# Altium PCB Gas_Gauge.PcbDoc
Units mm, origin at the board's own origin, x right, y up, seen from the top; angles counter-clockwise.
Board outline 100.33 x 95.76 mm, 2 copper layers (Top Layer, Bottom Layer); 76 components, 52 nets, 227 pads, 131 vias.
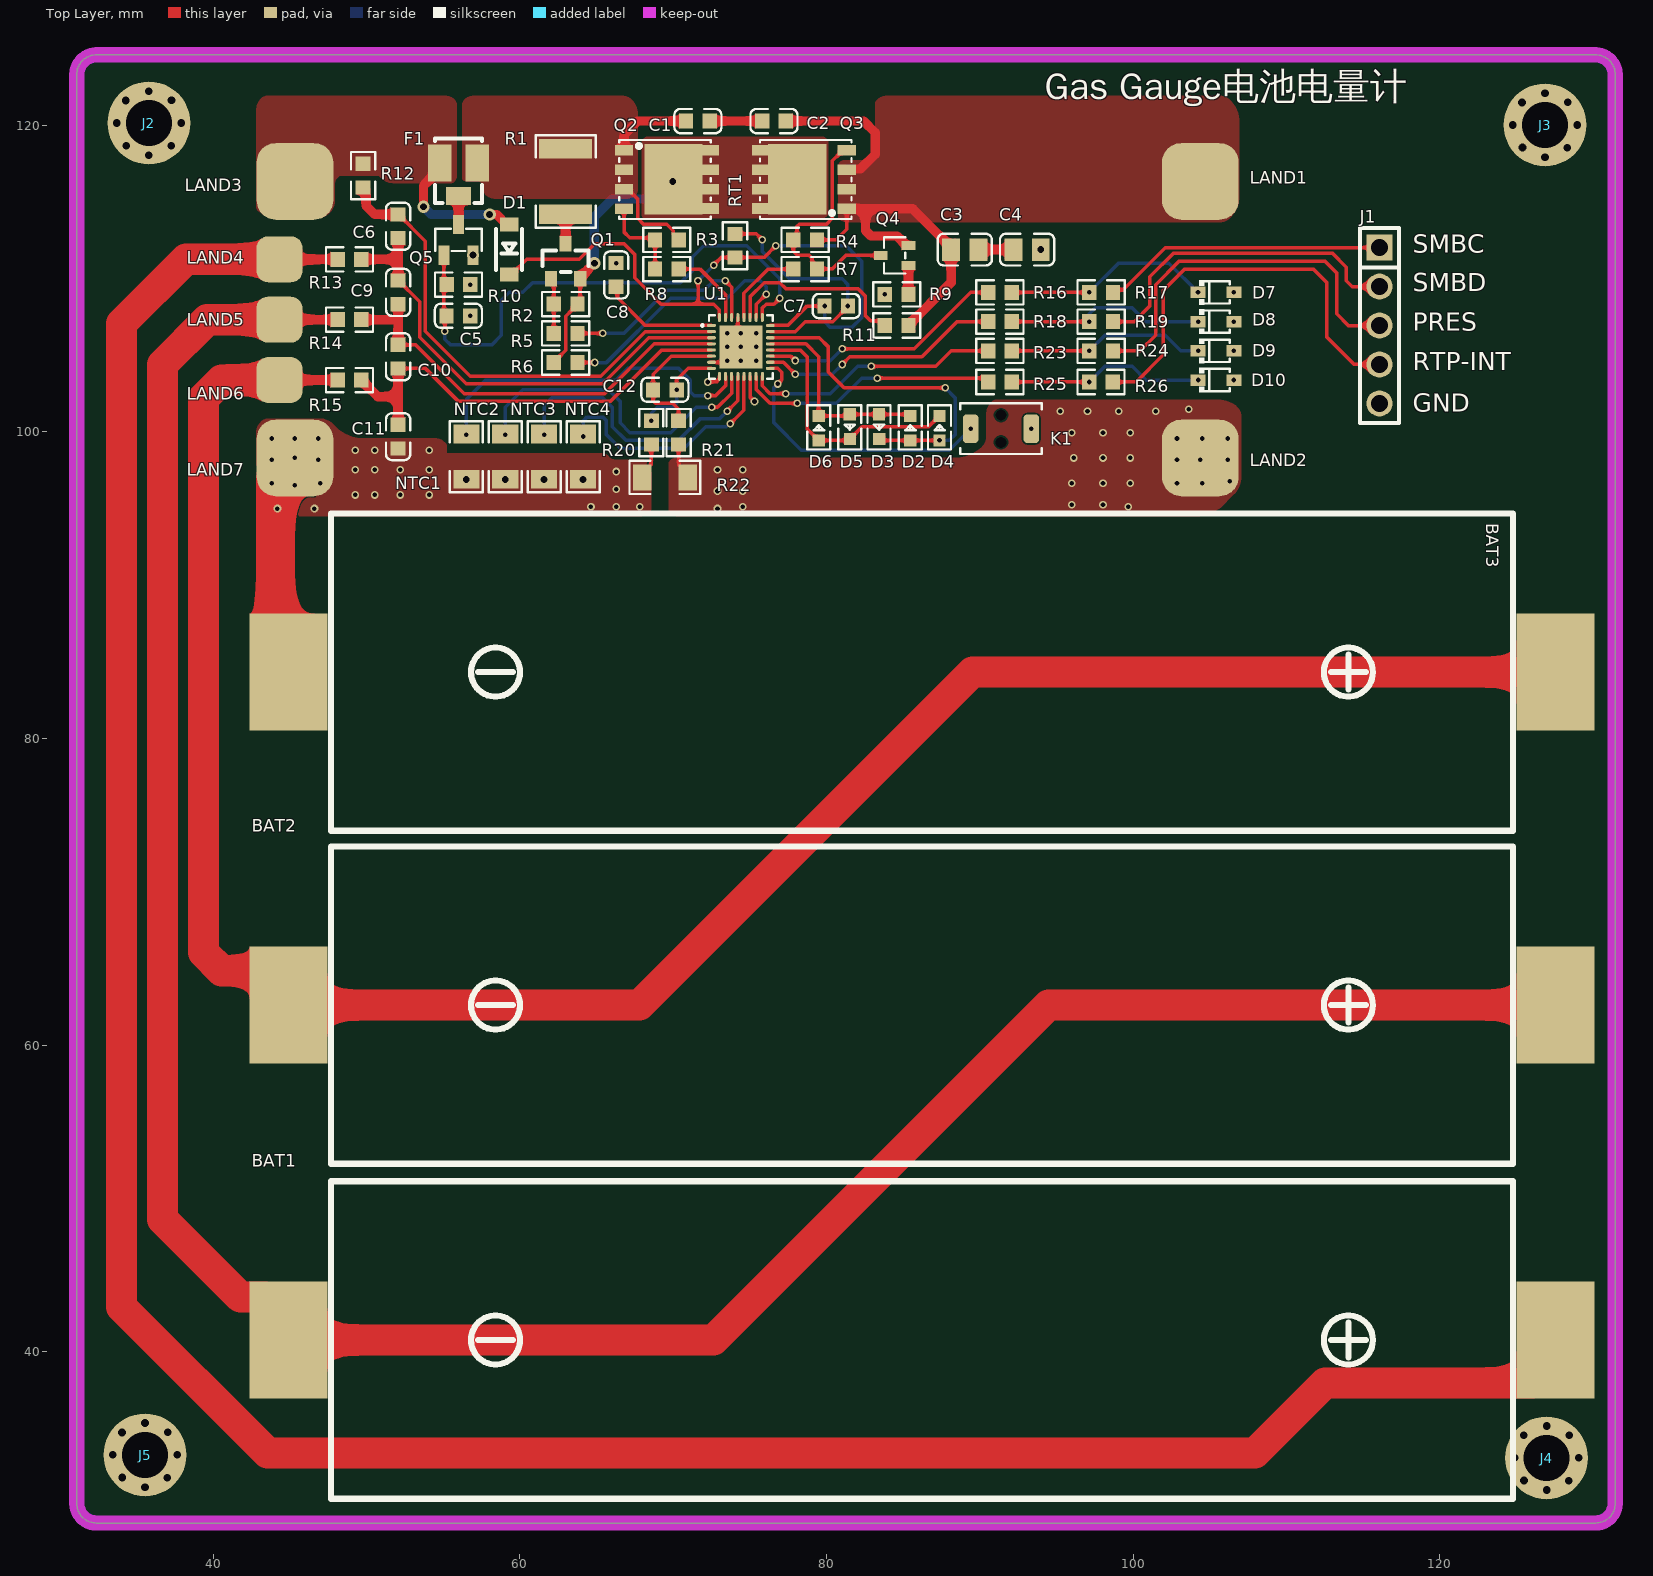
[diagram p0: Top Layer view]
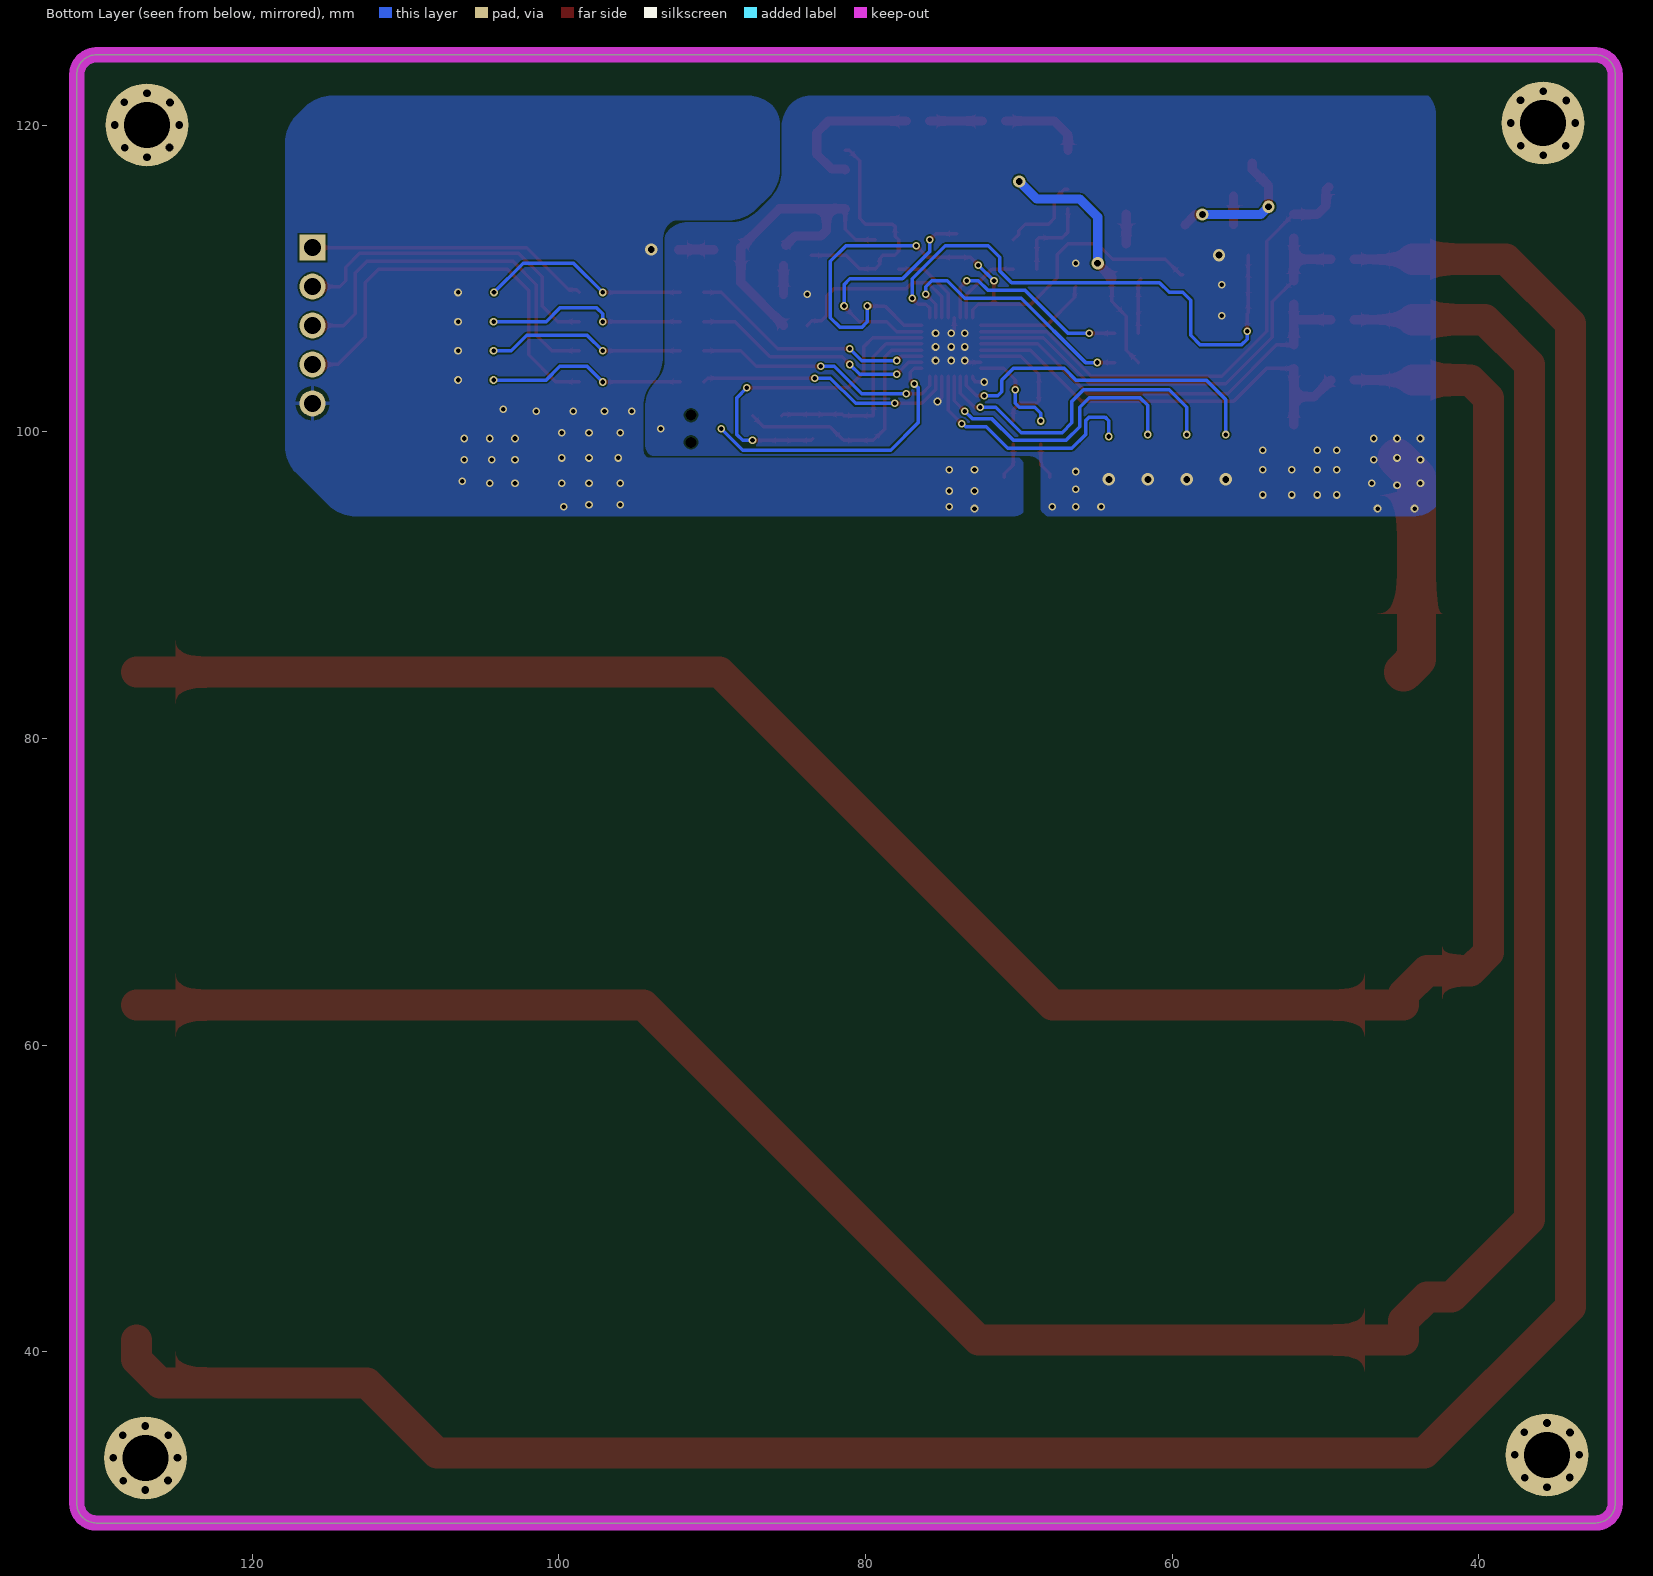
[diagram p1: Bottom Layer view, seen from below]
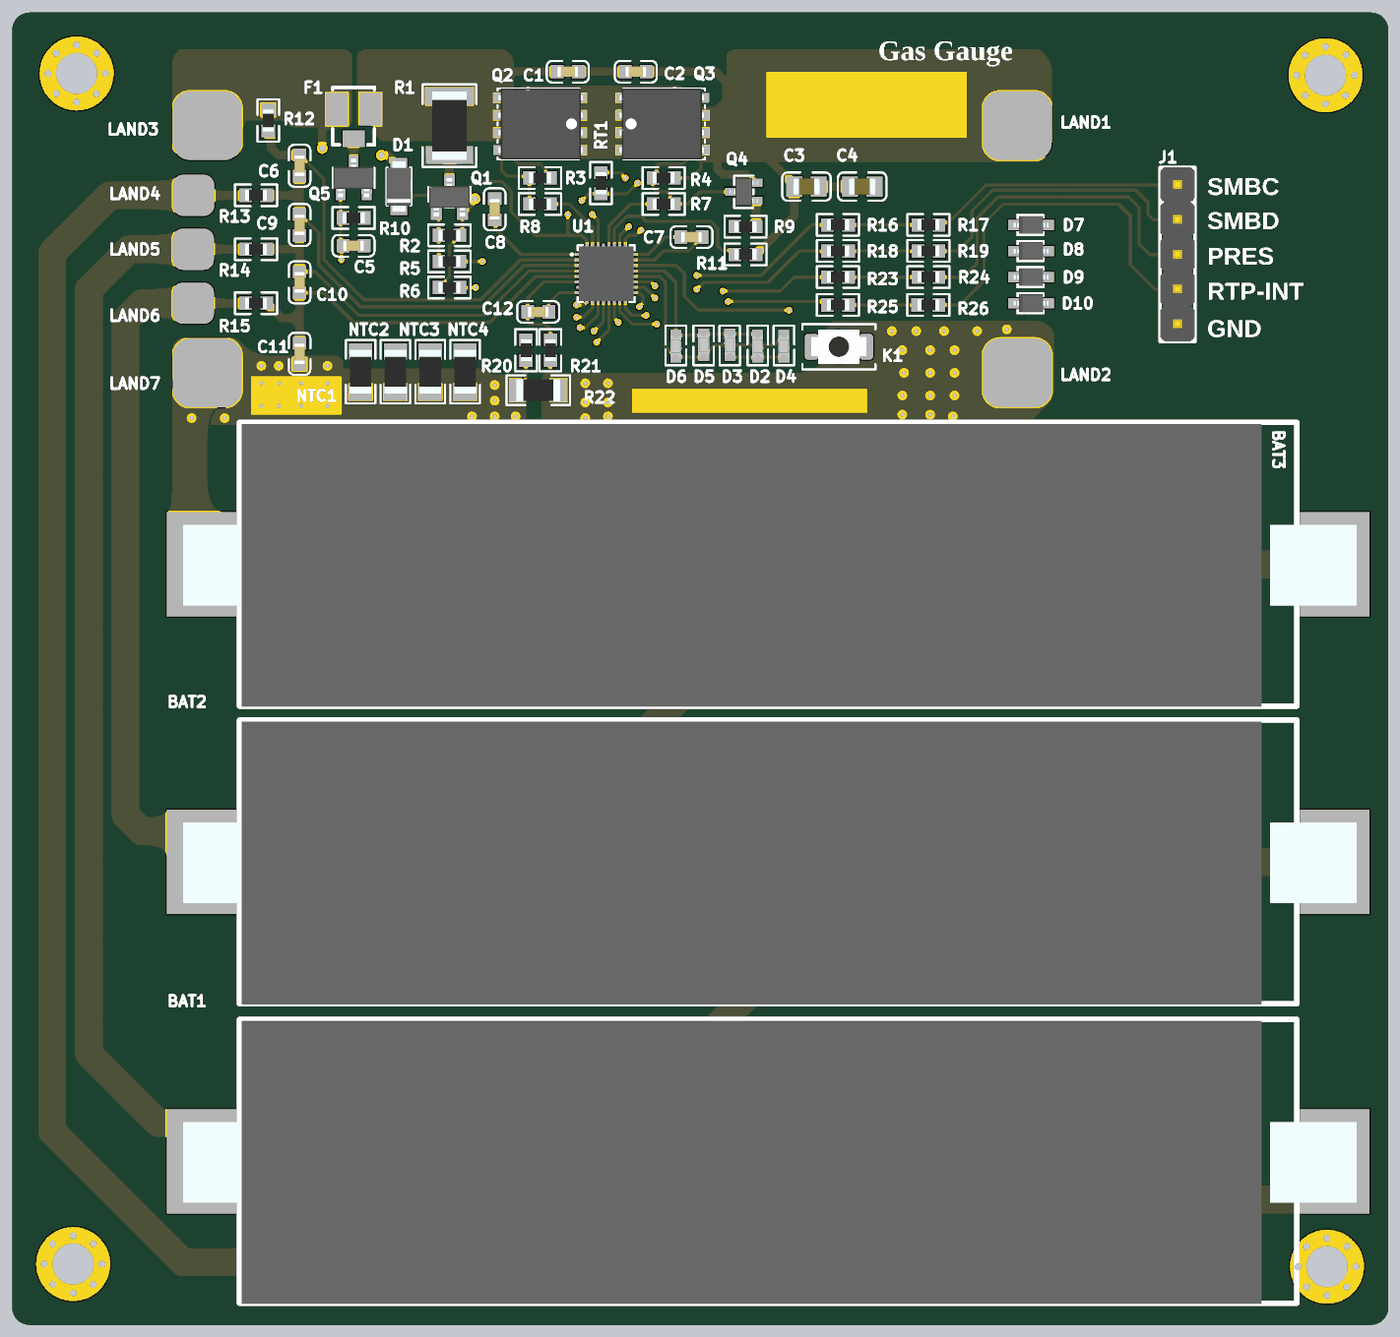
[diagram p2: 3D render of the assembled board from above, using the file's embedded part models]

## Layer stack, top to bottom
Top Solder: solder mask 0.0102, Solder Resist, Dk 3.5
Top Layer: signal copper 0.0356
Dielectric 1: dielectric 0.32, FR-4, Dk 4.8
Bottom Layer: signal copper 0.0356
Bottom Solder: solder mask 0.0102, Solder Resist, Dk 3.5

## Board outline
31.115,30.099 31.115,123.317 cw(c32.385,123.317) 32.385,124.587 130.175,124.587 cw(c130.175,123.317) 131.445,123.317 131.445,30.099 cw(c130.175,30.099) 130.175,28.829 32.385,28.829 cw(c32.385,30.099)

## Design rules (kind name [scope] priority, off if disabled: settings)
Clearance [All] p1: gap=0.102 ignorepadtopadclearanceinfootprint=FALSE
HoleSize [All] p1: absolutevalues=TRUE maxlimit=6.5 minlimit=0.25 maxpercent=80.000 minpercent=20.000
HoleToHoleClearance [All] p1: gap=0 allowstackedmicrovias=TRUE
MinimumSolderMaskSliver [All] p1: minsoldermaskwidth=0
PlaneConnect [All] p1: pad.planeconnectstyle=Relief pad.reliefexpansion=0.508 pad.reliefentries=4 pad.reliefconductorwidth=0.254 pad.reliefairgap=0.254 via.planeconnectstyle=Direct via.reliefexpansion=0.508 via.reliefentries=4 via.reliefconductorwidth=0.254 via.reliefairgap=0.254
PolygonConnect [All] p1: thpad.connectstyle=Relief thpad.reliefconductorwidth=0.254 thpad.reliefentries=4 thpad.polygonreliefangle="90 Angle" thpad.airgapwidth=0.254 smdpad.connectstyle=Direct smdpad.reliefconductorwidth=0.254 smdpad.reliefentries=4 smdpad.polygonreliefangle="90 Angle" smdpad.airgapwidth=0.254 via.connectstyle=Direct via.reliefconductorwidth=0.254 via.reliefentries=4 via.polygonreliefangle="90 Angle" via.airgapwidth=0.254
RoutingVias [All] p1: holewidth=0.711 width=1.27 viastyle="Through Hole" minholewidth=0.25 minwidth=0.25 maxholewidth=6.5 maxwidth=6.5
SilkToSilkClearance [All] p1: silktosilkclearance=0
SilkToSolderMaskClearance [IsPad] p1: minsilkscreentomaskgap=0 clearancetoexposedcopper=TRUE
SolderMaskExpansion [All] p1: expansion=0.102 istentingtop=FALSE
Width [All] p1: maxlimit=12.7 minlimit=0.152 preferedwidth=0.254
24 further rules are at their usual default settings.

## Components (designator, comment, footprint, x,y, rotation, side; value= is the part's Value field where it differs from the comment)
BAT1 "3.7V" BH-18650-B1BA002 86.233,40.767 r270 top locked
BAT2 "3.7V" BH-18650-B1BA002 86.233,62.611 r270 top locked
BAT3 "3.7V" BH-18650-B1BA002 86.233,84.328 r270 top locked
C1 "100nF" C0603 71.62,120.269 r180 top
C2 "100nF" C0603 76.581,120.269 r180 top
C3 "100nF" C0805 89.025,111.887 r0 top
C4 "100nF" C0805 93.09,111.887 r180 top
C5 "100nF" C0603 55.999,107.569 r0 top
C6 "100nF" C0603 52.07,113.411 r270 top
C7 "100nF" C0603 80.645,108.204 r0 top
C8 "2.2uF" C0603 66.294,110.236 r270 top
C9 "100nF" C0603 52.07,109.093 r270 top
C10 "100nF" C0603 52.07,104.902 r270 top
C11 "100nF" C0603 52.07,99.687 r270 top
C12 "100nF" C0603 69.469,102.743 r180 top
D1 "1N5819W" DIODE_SOD-123 59.309,111.887 r90 top
D2 "LED" LED0603 85.471,100.241 r270 top
D3 "LED" LED0603 83.439,100.34 r90 top
D4 "LED" LED0603 87.376,100.241 r270 top
D5 "LED" LED0603 81.534,100.34 r90 top
D6 "LED" LED0603 79.502,100.241 r270 top
D7 "CESD3V3D3" CESD3V3D3 105.41,109.093 r0 top
D8 "CESD3V3D3" CESD3V3D3 105.41,107.188 r0 top
D9 "CESD3V3D3" CESD3V3D3 105.41,105.283 r0 top
D10 "CESD3V3D3" CESD3V3D3 105.41,103.378 r0 top
F1 "12A" CLM1612P1412 56.007,116.459 r90 top
J1 "HEADER5P" HEADER5P 116.078,106.934 r270 top
J2 "NONE" J-LOCATION 35.814,120.142 r0 top
J3 "NONE" J-LOCATION 126.873,120.015 r0 top
J4 "NONE" J-LOCATION 126.976,33.079 r0 top
J5 "NONE" J-LOCATION 35.56,33.274 r0 top
K1 "ZX-QC34-2TPDZ" ZX-QC34-2TPDZ 91.389,100.203 r0 top
LAND1 "LAND" LAND 104.394,116.332 r0 top
LAND2 "LAND" LAND 104.394,98.298 r0 top
LAND3 "LAND" LAND 45.339,116.332 r0 top
LAND4 "LAND" LAND1 44.339,111.252 r90 top
LAND5 "LAND" LAND1 44.323,107.315 r90 top
LAND6 "LAND" LAND1 44.323,103.378 r90 top
LAND7 "LAND" LAND 45.339,98.298 r0 top
NTC1 "QN1206X103F3450FB（NTC）" R1206 56.515,98.38 r90 top
NTC2 "QN1206X103F3450FB（NTC）" R1206 59.055,98.38 r90 top
NTC3 "QN1206X103F3450FB（NTC）" R1206 61.595,98.38 r90 top
NTC4 "QN1206X103F3450FB（NTC）" R1206 64.135,98.38 r90 top
Q1 "AO3401A" AO3401A 62.992,111.125 r270 top
Q2 "NP60S04D6-Sn-G" NP60S04D6-Sn-G 69.596,116.459 r270 top
Q3 "NP60S04D6-Sn-G" NP60S04D6-Sn-G 78.538,116.459 r90 top
Q4 "SN7002W" SN7002W 84.455,111.506 r0 top
Q5 "AO3400A" AO3400A 56.007,112.522 r270 top
R1 "300R" R1812 62.992,116.332 r270 top
R2 "10M" R0603 62.992,108.331 r0 top
R3 "10M" R0603 69.596,112.522 r0 top
R4 "10M" R0603 78.613,112.522 r0 top
R5 "5.1K" R0603 62.992,106.426 r180 top
R6 "100R" R0603 62.992,104.521 r180 top
R7 "5.1K" R0603 78.613,110.617 r0 top
R8 "5.1K" R0603 69.596,110.617 r180 top
R9 "10K" R0603 84.582,108.966 r0 top
R10 "51K" R0603 56.007,109.601 r180 top
R11 "10K" R0603 84.582,106.934 r180 top
R12 "100R" R0603 49.784,116.713 r270 top
R13 "100R" R0603 48.895,111.252 r0 top
R14 "100R" R0603 48.895,107.315 r0 top
R15 "100R" R0603 48.895,103.378 r0 top
R16 "200R" R0603 91.321,109.093 r180 top
R17 "100R" R0603 97.917,109.093 r180 top
R18 "200R" R0603 91.321,107.188 r180 top
R19 "100R" R0603 97.917,107.188 r180 top
R20 "100R" R0603 68.58,99.949 r90 top
R21 "100R" R0603 70.358,99.949 r90 top
R22 "FRM121WFR001TM（1mR 50ppm）" R1206 69.469,97.028 r0 top
R23 "200R" R0603 91.321,105.283 r180 top
R24 "1K" R0603 97.917,105.283 r180 top
R25 "200R" R0603 91.321,103.251 r180 top
R26 "100R" R0603 97.909,103.251 r180 top
RT1 "PRF18BA103QB1RB tb平台" R0603 74.041,112.141 r270 top
U1 "BQ40Z50RSMR-R1" BQ40Z50RSMR-R1 74.422,105.537 r270 top

## Footprints (in the part's own frame and the unit in brackets; to place one, negate y for a bottom-side part, rotate by r counter-clockwise, add the part's x,y. Pads: shape width x height; smd on the part's side, far side on the other; paste and mask are expansions set on the pad)
AO3400A [mm] "SOT-23-3_L2.9-W1.3-P1.90-LS2.4-BR"
  rect 1.25x0.7 smd: 1(1,-0.95) 2(1,0.95) 3(-1,0)
  silkscreen extent -0.73,-1.53 0.73,1.53, body extent -1.4,-1.48 1.4,1.48, height 1.25
AO3401A [mm] "SOT-23_L2.9-W1.3-P1.90-LS2.4-BR"
  rect 1x0.8 smd: 1(1.15,-0.95) 2(1.15,0.95) 3(-1.15,0)
  silkscreen extent -0.7,-1.5 0.7,1.5, body extent -1.4,-1.48 1.4,1.48, height 1.25
BH-18650-B1BA002 [mil] "BATTERY-SMD_18650-1S-L77.1-W20.7-1"
  rect 300x200 smd: 1(0,-1626.5) 2(0,1626.5)
  silkscreen extent -408,-1518 408,1518, body extent -403,-1679 409,1689, height 597
BQ40Z50RSMR-R1 [mm] "VQFN-32_L4.0-W4.0-P0.40-BL-EP"
  oval 0.2x0.58 smd: 1(-1.4,-1.917) 2(-1,-1.917) 3(-0.6,-1.917) 4(-0.2,-1.917) 5(0.2,-1.917) 6(0.6,-1.917) 7(1,-1.917) 8(1.4,-1.917) 17(1.4,1.917) 18(1,1.917) 19(0.6,1.917) 20(0.2,1.917) 21(-0.2,1.917) 22(-0.6,1.917) 23(-1,1.917) 24(-1.4,1.917)
  oval 0.58x0.2 smd: 9(1.917,-1.4) 10(1.917,-1) 11(1.917,-0.6) 12(1.917,-0.2) 13(1.917,0.2) 14(1.917,0.6) 15(1.917,1) 16(1.917,1.4) 25(-1.917,1.4) 26(-1.917,1) 27(-1.917,0.6) 28(-1.917,0.2) 29(-1.917,-0.2) 30(-1.917,-0.6) 31(-1.917,-1) 32(-1.917,-1.4)
  rect 2.8x2.8 smd: 33(0,0)
  silkscreen extent -2.08,-2.58 2.08,2.08, body extent -2,-2 2,2, height 1
C0603 [mm]
  rect 0.93x0.98 smd: 1(-0.77,0) 2(0.77,0)
  silkscreen extent -1.53,-0.79 1.54,0.79, body extent -0.76,-0.38 0.76,0.38, height 0.91
C0805 [mm]
  rect 1.16x1.47 smd: 1(-0.89,0) 2(0.89,0)
  silkscreen extent -1.77,-1.04 1.77,1.04, body extent -1,-0.63 1,0.63, height 1.3
CESD3V3D3 [mm] "SOD-323_L1.8-W1.3-LS2.5-RD"
  rect 1x0.75 smd: 1(-1.173,0) 2(1.173,0)
  silkscreen extent -1.08,-0.8 0.9,0.8, body extent -1.27,-0.65 1.27,0.65, height 1.14
CLM1612P1412 [mm] "FUSE-SMD_CLM1612P1215C"
  rect 2.4x1.55 smd: 1(1.075,-1.225) 3(1.075,1.225)
  rect 1.2x1.6 smd: 2(-1.075,0)
  silkscreen extent -1.52,-1.52 2.67,1.52, body extent -1.57,-1.54 2.64,1.54, height 1.25
DIODE_SOD-123 [mil] "DIODE_SOD-123"
  rect 35.8x48 smd: 1(64,0) 2(-64,0)
  silkscreen extent -53,-33 53,33, body extent -72,-35 72,35, height 43
HEADER5P [mm] "HDR-TH_5P-P2.54-V-M"
  rect 1.7x1.7 hole 1.1: 1(-5.08,0)
  round 1.7 hole 1.1: 2(-2.54,0) 3(0,0) 4(2.54,0) 5(5.08,0)
  silkscreen extent -6.35,-1.27 6.35,1.27, body extent -6.38,-1.27 6.32,1.27, height 10.1
J-LOCATION [mm] "定位孔"
  round 1 hole 0.5: 0(-2.1,0) 0(-1.5,1.465) 0(-1.475,-1.475) 0(0,-2.1) 0(0,2.075) 0(1.45,-1.485) 0(1.475,1.475) 0(2.1,0)
  round 5.4 hole 3: 0(0,0)
LAND [mm] "测试焊盘"
  rrect50% 5x5 smd: 1(0,0)
LAND1 [mm] "测试焊盘"
  rrect50% 3x3 smd: 1(0,0)
LED0603 [mm] "LED0603"
  rect 0.8x0.8 smd paste+0 mask+0.051: A(0.8,0.003) K(-0.8,-0.003)
  silkscreen extent -1.49,-0.75 1.39,0.76, body extent -0.8,-0.4 0.8,0.4, height 0.6
NP60S04D6-Sn-G [mm] "PDFN-8_L5.8-W4.9-P1.27-LS6.1-BL"
  rect 0.7x1.2 smd paste-100 mask+0.05: 1(-1.905,-2.792) 2(-0.635,-2.792) 3(0.635,-2.792) 4(1.905,-2.792) 5(1.9,2.792) 6(0.64,2.792) 7(-0.63,2.792) 8(-1.9,2.792)
  rect 4.6x3.8 smd paste-100 mask+0.05: 9(0,0.433)
  silkscreen extent -2.58,-3.1 2.58,2.86, body extent -2.68,-3.02 2.68,3.14, height 1.09
R0603 [mm]
  rect 0.93x0.98 smd: 1(-0.77,0) 2(0.77,0)
  silkscreen extent -1.53,-0.79 1.54,0.79, body extent -0.8,-0.4 0.8,0.4, height 0.55
R1206 [mm]
  rect 1.208x1.701 smd mask+0.051: 1(-1.479,0) 2(1.479,0)
  silkscreen extent -2.31,-1.08 2.31,1.08, body extent -1.6,-0.8 1.6,0.8, height 0.75
R1812 [mm]
  rect 1.283x3.456 smd paste-100 mask+0.051: 1(-2.141,0) 2(2.141,0)
  silkscreen extent -3.01,-1.96 3.01,1.96, body extent -2.5,-1.25 2.5,1.25, height 0.6
SN7002W [mm] "SC-70-3_L2.1-W1.3-P1.30-LS2.1-BR-1"
  rect 0.9x0.6 smd: 1(0.91,-0.65) 2(0.91,0.65) 3(-0.91,0)
  silkscreen extent -0.7,-1.18 0.7,1.18, body extent -1.05,-1 1.05,1, height 1
ZX-QC34-2TPDZ [mil] "KEY-SMD_L3.9-W3.0-LS5.0-EH"
  round 0 hole 28: 0(0,-35) 0(0,35)
  rrect50% 40x74 smd: 1(-78,0) 2(78,0)
  silkscreen extent -105,-65 105,65, body extent -79,-49 79,49, height 63

## Part data
BAT1 BAT2 BAT3: library part BH-18650-B1BA002, "MYOUNG(美阳)BHAu SMT/适用电池18650平头电芯//电池底座/ 卧式自动化生产贴片电池盒/符合耐高温SMT回流焊工艺/材质:PA46/SUS304 T=0.35mm/镀金/"
C1 C2 C3 C4 C5 C6 C7 C8 C9 C10 C11 C12: library part CAP, "独石电容"
D1: library part DIODE, "二极管", Code_JEDEC=DO-204-AL, ComponentLink1Description="Manufacturer Link", ComponentLink1URL=http://www.fairchildsemi.com/, ComponentLink2Description=Datasheet, ComponentLink2URL=http://www.fairchildsemi.com/ds/1N%2F1N4001.pdf, DatasheetVersion=1998, LatestRevisionDate=17-Jul-2002, LatestRevisionNote="Re-released for DXP Platform.", PackageDescription="Diode, Axial; Body 5.2 x 2.7 mm (LxDia. max), Lead Dia. 0.86 mm (max)", PackageReference=DO-41, PackageVersion=Aug-1999, Published=8-Jun-2000, Publisher="Altium Limited"
D2 D3 D4 D5 D6: "贴片LED"
D7 D8 D9 D10: "静电和浪涌保护(TVS),反向截止电压(Vrwm):3.3V,钳位电压:13V,峰值脉冲电流(Ipp):16A。"
F1: library part CLM1612P1412, "4串锂电池三端保险丝 12A"
J1: "5P排针"
J2 J3 J4 J5: library part J-LOCATION, "定位孔"
K1: "3*4*2贴片开关带柱"
LAND1 LAND2 LAND3 LAND4 LAND5 LAND6 LAND7: "测试焊盘"
NTC1 NTC2 NTC3 NTC4 R1 R2 R3 R4 R5 R6 R7 R8 R9 R10 R11 R12 R13 R14 R15 R16 R17 R18 R19 R20 R21 R22 R23 R24 R25 R26 RT1: library part RES, "电阻"
Q1: "PMOS UMW(友台半导体) 漏源电压(Vdss):30V,连续漏极电流(Id):4.2A,导通电阻(RDS(on)):50mΩ@10V"
Q2 Q3: "NMOS natlinear(南麟) 漏源电压(Vdss):40V,连续漏极电流(Id):60A,导通电阻(RDS(on)):5.9mR。"
Q4: "PMOS Leiditech(雷卯电子) 漏源电压(Vdss):60V,连续漏极电流(Id):115mA,导通电阻(RDS(on)):1.4Ω。"
Q5: "PMOS UMW(友台半导体) 漏源电压(Vdss):30V,连续漏极电流(Id):5.8A,耗散功率(Pd):1.4W。"
U1: "BQ40Z50-R1 支持涡轮模式 1.0 的 1 至 4 节串联锂离子电池组管理器（锂电池电量计）"

## Via types
v1: diameter 0.5, hole 0.3, Top Layer to Bottom Layer, 121 vias
v2: diameter 0.8, hole 0.45, Top Layer to Bottom Layer, 10 vias

## Nets (pads, with @x,y where several pads share a name; then routed paths per layer and width w, separated by ;. In a path a pad name is that pad's centre, name@x,y a point inside that pad or via, vN(x,y) a via of type N, cw(c..) or ccw(c..) an arc to the next point about the centre after c; other vN are vias at no path point)
4.2V: BAT2.1 BAT3.2 LAND6.1 R15.1 | length 144.4
  Top Layer w0.61: LAND6.1 R15.1
  Top Layer w2.032: LAND6.1 40.56,103.378 39.37,102.188 39.37,66.038 40.56,64.848 43.396,64.848 44.92,63.324 BAT2.1 67.818,62.611 89.535,84.328 BAT3.2
8.4V: BAT1.1 BAT2.2 LAND5.1 R14.1 | length 172.3
  Top Layer w0.61: LAND5.1 R14.1
  Top Layer w2.032: LAND5.1 39.624,107.315 36.703,104.394 36.703,48.641 41.783,43.561 43.396,43.561 44.92,42.037 BAT1.1 72.644,40.767 94.488,62.611 BAT2.2
12.6V: BAT1.2 LAND4.1 R13.1 | length 181.2
  Top Layer w0.61: LAND4.1 R13.1
  Top Layer w2.032: LAND4.1 38.227,111.252 34.036,107.061 34.036,42.926 43.561,33.401 107.95,33.401 112.522,37.973 126.022,37.973 127.546,39.497 BAT1.2
BAT: C7.1 D1.2 RT1.2 U1.24 U1.32 | length 42.9
  Top Layer w0.229: D1.2 59.464,110.261 60.455,111.252 63.881,111.252 64.897,112.268 66.802,112.268 67.501,111.569 67.501,110.045 69.215,108.331 71.628,108.331 ; v1(71.628,109.855) 71.628,108.331 ; v1(72.644,110.871) 73.144,111.371 75.938,111.371 v1(76.708,112.141) ; U1.32 73.022,107.953 72.644,108.331 71.628,108.331 ; U1.24 77.473,106.937 78.74,108.204 C7.1
  Bottom Layer w0.229: v1(71.628,109.855) v1(72.644,110.871) ; v1(76.708,112.141) 81.28,112.141 82.296,111.125 82.296,107.442 81.661,106.807 80.264,106.807 79.883,107.188 v1(79.883,108.204)
BAT+: D1.1 F1.3 LAND3.1 R12.1 | length 9.4
  Top Layer w0.229: D1.1@59.154,113.513 D1.1
  Top Layer w0.61: v2(53.721,114.681) 53.721,116.048 54.782,117.109 F1.3 ; v2(58.039,114.173) 58.494,114.173 D1.1@59.154,113.513
  Bottom Layer w0.61: v2(53.721,114.681) 54.229,114.173 v2(58.039,114.173)
BAT-: BAT3.1 C5.2 C8.1 C11.2 K1.2 LAND7.1 NTC1.1 NTC2.1 NTC3.1 NTC4.1 Q5.2 R9.1 R10.1 R20.1 R22.1 U1.7 U1.9 U1.14 U1.29 U1.33 | length 22.2
  Top Layer w0.229: R22.1 67.99,97.275 68.58,97.865 R20.1 ; v1(72.263,103.251) 72.815,103.251 73.022,103.458 U1.9 ; U1.7 73.422,104.537 v1(73.533,104.648) ; U1.29 74.222,106.626 v1(74.422,106.426) ; U1.14 75.022,102.27 v1(75.311,101.981)
  Top Layer w2.54: BAT3.1 44.069,85.179 44.069,97.028 v1(45.339,98.298)
  other v1: 44.196,94.996 46.609,94.996 64.643,95.123 66.294,95.123 67.818,95.123 49.276,95.885 50.546,95.885 52.197,95.885 54.102,95.885 66.294,96.266 45.339,96.52 43.815,96.647 46.99,96.647 66.294,97.409 49.276,97.536 50.546,97.536 52.197,97.536 54.102,97.536 43.815,98.171 46.863,98.171 49.276,98.806 50.546,98.806 54.102,98.806 43.815,99.568 45.339,99.568 46.863,99.568 93.37,100.203 74.422,104.648 75.438,104.648 73.533,105.537 74.422,105.537 75.438,105.537 73.533,106.426 75.438,106.426 56.769,107.569 83.812,108.966 56.777,109.601 66.294,111.006
  other v2: 56.515,96.901 59.055,96.901 61.595,96.901 64.135,96.901 56.957,111.522
GND: C4.1 D7.2 D8.2 D9.2 D10.2 J1.5 LAND2.1 R21.1 R22.2 | length 2.4
  Top Layer w0.229: R21.1 70.358,97.865 70.948,97.275 R22.2
  other v1: 72.898,94.996 74.549,95.123 99.695,95.123 96.012,95.25 98.044,95.25 72.898,96.139 74.549,96.139 96.012,96.647 98.044,96.647 99.822,96.647 102.87,96.647 104.521,96.647 106.299,96.774 72.898,97.536 74.549,97.536 102.87,98.171 104.394,98.171 106.172,98.171 96.139,98.298 98.044,98.298 99.822,98.298 102.87,99.568 104.521,99.568 106.172,99.568 96.012,99.949 98.044,99.949 99.822,99.949 95.25,101.346 97.028,101.346 99.06,101.346 101.473,101.346 103.632,101.473 106.583,103.378 106.583,105.283 106.583,107.188 106.583,109.093
  other v2: 93.98,111.887
NetC1_1: C1.1 C2.2 | length 3.4
  Top Layer w0.61: C1.1 C2.2
NetC1_2: C1.2 F1.1 Q2.1 Q2.2 Q2.3 R1.1 R3.2 | length 11.2
  Top Layer w0.229: Q2.3 67.054,115.824 67.691,115.187 67.691,113.919 68.072,113.538 69.596,113.538 70.015,113.119 70.015,112.873 R3.2
  Top Layer w0.61: Q2.1 66.804,119.382 67.691,120.269 C1.2
NetC3_2: C3.2 C4.2 | length 2.3
  Top Layer w0.61: C3.2 C4.2
NetC5_1: C5.1 Q5.1 R10.2 U1.25 | length 36.2
  Top Layer w0.229: Q5.1 55.057,107.766 55.118,107.705 v1(55.118,106.553) ; U1.25 75.822,108.08 76.073,108.331 76.581,108.331 v1(76.962,108.712)
  Bottom Layer w0.229: v1(55.118,106.553) 55.118,106.045 55.499,105.664 58.166,105.664 58.801,106.299 58.801,108.585 59.309,109.093 60.198,109.093 60.833,109.728 70.485,109.728 71.247,110.49 71.247,111.379 72.009,112.141 74.803,112.141 76.962,109.982 v1(76.962,108.712)
NetC6_1: C6.1 R12.2 U1.2 | length 33.1
  Top Layer w0.229: C6.1 52.095,114.181 53.848,112.428 53.848,106.553 56.769,103.632 65.278,103.632 68.183,106.537 U1.2
  Top Layer w0.61: R12.2 49.809,115.943 49.969,115.783 49.969,114.75 50.538,114.181 C6.1
NetC6_2: C6.2 C9.1 R13.2 U1.3 | length 31
  Top Layer w0.229: C9.1 52.095,109.863 53.467,108.491 53.467,106.172 56.515,103.124 65.405,103.124 68.418,106.137 U1.3
  Top Layer w0.61: R13.2 52.07,111.252 ; C9.1 52.07,111.252 ; C6.2 52.07,111.252
NetC7_2: C7.2 RT1.1 U1.23 | length 16.4
  Top Layer w0.229: RT1.1 75.43,112.911 v1(75.819,112.522) ; U1.23 77.962,106.537 78.613,107.188 80.424,107.188 81.415,108.179 C7.2
  Bottom Layer w0.229: v1(75.819,112.522) 75.819,111.76 77.597,109.982 81.026,109.982 81.407,109.601 v1(81.407,108.204)
NetC8_2: C8.2 U1.1 | length 7.6
  Top Layer w0.229: C8.2 66.364,109.396 66.364,108.769 68.196,106.937 U1.1
NetC9_2: C9.2 C10.1 R14.2 U1.4 | length 28.2
  Top Layer w0.229: C10.1 53.205,105.672 56.388,102.489 65.532,102.489 68.78,105.737 U1.4
  Top Layer w0.61: R14.2 51.943,107.315 52.07,107.442 ; C10.1 52.07,107.442 ; C9.2 52.07,107.442
NetC10_2: C10.2 C11.1 R15.2 U1.5 | length 29.3
  Top Layer w0.229: C10.2 53.856,104.132 56.007,101.981 65.913,101.981 69.269,105.337 U1.5
  Top Layer w0.61: R15.2 49.665,103.353 49.825,103.193 49.85,103.193 50.749,102.295 52.07,102.295 ; C11.1 52.07,102.295 ; C10.2 52.07,102.295
NetC12_1: C12.1 R20.2 U1.8 | length 6.5
  Top Layer w0.229: v1(70.239,102.743) 70.239,103.386 70.99,104.137 U1.8
  Bottom Layer w0.229: v1(68.58,100.711) 68.58,101.219 68.961,101.6 69.977,101.6 70.239,101.862 v1(70.239,102.743)
NetC12_2: C12.2 R21.2 U1.6 | length 8.7
  Top Layer w0.229: R21.2 70.358,101.473 69.977,101.854 68.856,101.854 68.707,102.003 68.707,102.735 C12.2 68.699,103.751 69.885,104.937 U1.6
NetD2_A: D2.A D3.K D4.A U1.22 | length 22.2
  Top Layer w0.229: U1.22 79.537,106.137 80.137,105.537 80.137,103.886 81.153,102.87 v1(87.757,102.87) ; D3.K 83.541,99.441 D2.A D4.A
  Bottom Layer w0.229: v1(87.376,99.441) 88.011,99.441 88.392,99.822 88.392,102.235 v1(87.757,102.87)
NetD2_K: D2.K D3.A D5.A D6.K U1.21 | length 13.4
  Top Layer w0.229: U1.21 78.667,105.737 79.499,104.905 D6.K 81.432,101.04 D5.A D3.A 85.369,101.139 D2.K
NetD4_K: D4.K D5.K D6.A U1.20 | length 16.9
  Top Layer w0.229: U1.20 78.305,105.337 78.74,104.902 78.74,100.206 D6.A 81.438,99.441 D5.K 82.327,100.33 86.662,100.33 D4.K
NetD7_1: D7.1 R16.1 R17.2 | length 13.7
  Top Layer w0.229: R16.1 v1(97.147,109.093)
  Bottom Layer w0.229: v1(97.147,109.093) 99.052,110.998 102.332,110.998 v1(104.237,109.093)
NetD8_1: D8.1 R18.1 R19.2 | length 13.2
  Top Layer w0.229: R18.1 R19.2
  Bottom Layer w0.229: v1(97.155,107.188) 97.155,107.696 97.536,108.077 99.949,108.077 100.838,107.188 v1(104.267,107.188)
NetD9_1: D9.1 R23.1 R24.2 | length 13
  Top Layer w0.229: R23.1 R24.2
  Bottom Layer w0.229: v1(97.155,105.283) 98.171,106.299 102.108,106.299 103.124,105.283 v1(104.267,105.283)
NetD10_1: D10.1 R25.1 R26.2 | length 12.9
  Top Layer w0.229: R25.1 R26.2
  Bottom Layer w0.229: v1(97.155,103.251) 98.171,104.267 99.949,104.267 100.838,103.378 v1(104.267,103.378)
NetF1_2: F1.2 Q5.3 | length 1.9
  Top Layer w0.61: Q5.3 F1.2
NetK1_1: K1.1 U1.17 | length 18.5
  Top Layer w0.229: U1.17 76.838,104.137 77.089,103.886 77.089,103.396 76.835,103.142 v1(76.835,103.124)
  Bottom Layer w0.229: v1(76.835,103.124) 76.581,102.87 76.581,100.584 78.359,98.806 88.011,98.806 v1(89.408,100.203)
NetNTC1_2: NTC1.2 U1.10 | length 22.1
  Top Layer w0.229: v1(72.263,102.362) 72.771,102.362 73.422,103.013 U1.10
  Bottom Layer w0.229: v1(56.515,99.822) 56.515,102.108 57.785,103.378 66.294,103.378 67.056,104.14 70.358,104.14 71.12,103.378 71.12,102.616 71.374,102.362 v1(72.263,102.362)
NetNTC2_2: NTC2.2 U1.11 | length 21.2
  Top Layer w0.229: v1(72.517,101.6) 72.898,101.6 73.822,102.524 U1.11
  Bottom Layer w0.229: v1(59.055,99.822) 59.055,101.6 60.198,102.743 65.786,102.743 66.548,101.981 66.548,100.584 67.183,99.949 69.85,99.949 71.501,101.6 v1(72.517,101.6)
NetNTC3_2: NTC3.2 U1.12 | length 19.3
  Top Layer w0.229: v1(73.53,101.343) 74.222,102.035 U1.12
  Bottom Layer w0.229: v1(61.595,99.822) 61.595,101.727 62.103,102.235 65.405,102.235 66.04,101.6 66.04,100.33 66.929,99.441 70.358,99.441 71.755,100.838 73.025,100.838 v1(73.53,101.343)
NetNTC4_2: NTC4.2 U1.13 | length 16.2
  Top Layer w0.229: v1(73.729,100.526) 74.622,101.419 U1.13
  Bottom Layer w0.229: v1(64.135,99.695) 64.135,100.711 64.389,100.965 65.405,100.965 65.659,100.711 65.659,99.822 66.548,98.933 70.739,98.933 72.136,100.33 73.466,100.33 73.662,100.526 v1(73.729,100.526)
NetQ1_1: Q1.1 R2.1 R5.2 | length 3.6
  Top Layer w0.229: Q1.1 62.222,109.795 R5.2
NetQ1_2: Q1.2 Q2.5 Q2.6 Q2.7 Q2.8 Q2.9 Q3.5 Q3.6 Q3.7 Q3.8 Q3.9 R2.2 R6.2 | length 16.7
  Top Layer w0.229: R6.2 62.222,104.546 62.992,105.316 62.992,107.536 63.762,108.306 R2.2 63.942,108.511 Q1.2
  Top Layer w0.61: Q1.2 63.942,110.075 v2(64.865,110.998)
  Bottom Layer w0.61: v2(64.865,110.998) 64.865,114.014 66.04,115.189 68.834,115.189 v2(69.977,116.332)
NetQ1_3: Q1.3 R1.2 | length 1.9
  Top Layer w0.61: Q1.3 R1.2
NetQ2_4: Q2.4 R3.1 R8.2 | length 5.7
  Top Layer w0.229: Q2.4 66.804,113.032 67.186,112.649 68.699,112.649 R3.1 R8.2
NetQ3_4: Q3.4 Q4.3 R4.1 R7.2 | length 16
  Top Layer w0.229: Q3.4 81.08,118.364 80.391,117.675 80.391,113.919 80.01,113.538 78.232,113.538 78.083,113.389 78.083,112.762 R4.1 77.843,111.768 78.105,111.506 78.867,111.506 79.077,111.296 79.077,110.923 R7.2 79.393,110.627 80.401,110.627 81.28,111.506 Q4.3
NetQ4_1: Q4.1 R9.2 | length 1.9
  Top Layer w0.229: Q4.1@85.352,110.851 85.357,110.856 Q4.1
  Top Layer w0.61: R9.2 Q4.1@85.352,110.851
NetR5_1: R5.1 U1.30 | length 13.6
  Top Layer w0.229: R5.1 v1(65.405,106.426) ; v1(73.406,109.855) 73.822,109.439 U1.30
  Bottom Layer w0.229: v1(65.405,106.426) 66.802,106.426 69.596,109.22 72.009,109.22 72.644,109.855 v1(73.406,109.855)
NetR6_1: R6.1 U1.26 | length 17
  Top Layer w0.229: R6.1 v1(64.897,104.521) ; U1.26 75.422,108.315 v1(76.073,108.966)
  Bottom Layer w0.229: v1(64.897,104.521) 65.659,104.521 69.85,108.712 73.533,108.712 74.676,109.855 75.692,109.855 76.073,109.474 v1(76.073,108.966)
NetR7_1: R7.1 U1.28 | length 5.5
  Top Layer w0.229: U1.28 74.622,109.039 76.2,110.617 R7.1
NetR8_1: R8.1 U1.31 | length 5.2
  Top Layer w0.229: R8.1 71.755,110.617 73.422,108.95 U1.31
NetR11_2: R11.2 U1.27 | length 12.4
  Top Layer w0.229: U1.27 75.022,108.804 75.946,109.728 76.962,109.728 77.343,109.347 82.042,109.347 82.55,108.839 82.55,107.569 82.879,107.24 83.506,107.24 R11.2
NetR16_2: R16.2 U1.19 | length 16.2
  Top Layer w0.229: U1.19 77.689,104.937 v1(77.978,104.648) ; v1(81.026,105.41) 85.725,105.41 89.408,109.093 R16.2
  Bottom Layer w0.229: v1(77.978,104.648) 80.264,104.648 v1(81.026,105.41)
NetR18_2: R18.2 U1.18 | length 16
  Top Layer w0.229: U1.18 77.2,104.537 v1(77.978,103.759) ; v1(81.026,104.394) 81.534,104.902 86.233,104.902 88.519,107.188 R18.2
  Bottom Layer w0.229: v1(77.978,103.759) 80.391,103.759 v1(81.026,104.394)
NetR23_2: R23.2 U1.16 | length 16.7
  Top Layer w0.229: U1.16 75.822,102.994 76.327,102.489 v1(77.343,102.489) ; v1(82.931,104.267) 87.122,104.267 88.138,105.283 R23.2
  Bottom Layer w0.229: v1(77.343,102.489) 80.264,102.489 82.042,104.267 v1(82.931,104.267)
NetR25_2: R25.2 U1.15 | length 17.2
  Top Layer w0.229: U1.15 75.422,102.759 76.327,101.854 v1(78.105,101.854) ; v1(83.312,103.505) 90.297,103.505 R25.2
  Bottom Layer w0.229: v1(78.105,101.854) 80.645,101.854 82.296,103.505 v1(83.312,103.505)
PACK+: C2.1 C3.1 LAND1.1 Q3.1 Q3.2 Q3.3 Q4.2 R4.2 R11.1 | length 32
  Top Layer w0.229: R4.2 80.645,112.522 81.33,113.207 Q3.1
  Top Layer w0.61: C2.1 82.423,120.269 83.185,119.507 83.185,118.11 82.214,117.139 81.375,117.139 Q3.3 ; Q3.1 82.55,114.554 ; Q4.2@85.22,112.161 84.605,112.776 82.907,112.776 82.55,113.133 82.55,114.554 ; R11.1 85.352,106.959 88.135,109.742 88.135,112.042 85.623,114.554 82.55,114.554
PRES: J1.3 R24.1 | length 25
  Top Layer w0.229: R24.1 100.457,105.283 101.473,106.299 101.473,109.601 102.997,111.125 112.522,111.125 113.284,110.363 113.284,107.696 114.046,106.934 J1.3
RTP-INT: J1.4 R26.1 | length 27.6
  Top Layer w0.229: R26.1 100.203,103.251 101.981,105.029 101.981,109.22 103.378,110.617 111.76,110.617 112.649,109.728 112.649,106.172 114.427,104.394 J1.4
SMBC: J1.1 R17.1 | length 18.6
  Top Layer w0.229: R17.1 98.861,109.267 99.361,109.267 102.108,112.014 J1.1
SMBD: J1.2 R19.1 | length 21.8
  Top Layer w0.229: R19.1 100.076,107.188 101.092,108.204 101.092,110.109 102.616,111.633 113.03,111.633 113.919,110.744 113.919,109.855 114.3,109.474 J1.2
pads on no net: J2.0 J3.0 J4.0 J5.0 K1.0

## Polygon pours and split planes (outlines as drawn)
BAT- on Top Layer "Top Layer-BAT-" (solid, remove dead copper, pour order 6): 42.799,95.303 ccw(c43.233,95.303) 42.926,94.996 ccw(c44.152,96.222) 44.152,94.488 67.84,94.488 ccw(c67.84,95.355) 68.453,94.742 ccw(c68.146,95.049) 68.58,95.049 68.58,97.431 ccw(c67.713,97.431) 68.326,98.044 ccw(c68.019,97.737) 68.019,98.171 66.347,98.171 ccw(c66.347,97.737) 66.304,98.169 66.304,98.171 cw(c66.304,98.808) 65.853,98.358 65.786,98.425 ccw(c65.326,97.965) 65.326,98.615 55.245,98.615 55.245,99.007 ccw(c54.811,99.007) 55.118,99.314 ccw(c54.505,98.701) 54.505,99.568 49.82,99.568 cw(c49.82,102.108) 48.024,100.312 47.767,100.569 ccw(c47.117,99.918) 47.117,100.838 43.487,100.838 ccw(c43.487,100.404) 43.18,100.711 43.068,100.599 ccw(c43.719,99.949) 42.799,99.949
GND on Top Layer "PACK+_L01_P-001" (solid, remove dead copper, pour order 7): 69.723,97.917 cw(c70.03,97.917) 69.813,98.134 69.85,98.171 cw(c70.157,97.864) 70.157,98.298 88.356,98.298 ccw(c88.356,100.838) 90.152,99.042 90.17,99.06 ccw(c89.557,99.673) 90.424,99.673 90.424,101.061 cw(c91.725,101.061) 90.805,101.981 cw(c91.112,101.674) 91.112,102.108 105.581,102.108 cw(c105.581,100.374) 106.807,101.6 cw(c106.194,100.987) 107.061,100.987 107.061,97.111 cw(c105.327,97.111) 106.553,95.885 105.9,95.232 cw(c104.104,97.028) 104.104,94.488 70.336,94.488 cw(c70.336,95.355) 69.723,94.742
PACK+ on Top Layer "PACK+_L01_P003" (solid, remove dead copper, pour order 3): 80.772,117.295 cw(c81.206,117.295) 80.899,117.602 cw(c81.206,117.295) 81.206,117.729 82.624,117.729 ccw(c82.624,118.163) 82.931,117.856 ccw(c82.318,118.469) 83.185,118.469 83.185,121.359 cw(c83.619,121.359) 83.312,121.666 cw(c83.925,121.053) 83.925,121.92 105.686,121.92 cw(c105.686,121.053) 106.299,121.666 cw(c104.766,120.133) 106.934,120.133 106.934,115.452 cw(c104.766,115.452) 106.299,113.919 cw(c105.686,114.532) 105.686,113.665 81.385,113.665 cw(c81.385,114.532) 80.772,113.919
NetQ1_2 on Top Layer "NETQ1_2_L01_P002" (solid, remove dead copper, pour order 2): 67.945,118.819 cw(c68.379,118.819) 68.072,119.126 cw(c68.379,118.819) 68.379,119.253 79.703,119.253 cw(c79.703,118.819) 80.01,119.126 cw(c79.703,118.819) 80.137,118.819 80.137,114.353 cw(c79.703,114.353) 80.01,114.046 cw(c79.703,114.353) 79.703,113.919 68.199,113.919 cw(c68.199,114.226) 67.982,114.009 67.945,114.046
NetC1_2 on Top Layer "NETC1_2_L01_P001" (solid, remove dead copper, pour order 1): 56.261,121.359 cw(c56.695,121.359) 56.388,121.666 cw(c57.001,121.053) 57.001,121.92 66.697,121.92 cw(c66.697,121.053) 67.31,121.666 cw(c66.39,120.746) 67.691,120.746 67.691,115.75 cw(c67.257,115.75) 67.564,115.443 cw(c66.951,116.056) 66.951,115.189 58.398,115.189 cw(c58.398,116.056) 57.785,115.443 cw(c58.092,115.75) 57.658,115.75 57.658,115.951 ccw(c57.351,115.951) 57.568,116.168 57.531,116.205 ccw(c57.224,115.898) 57.224,116.332 56.568,116.332 cw(c56.568,116.766) 56.261,116.459 56.261,118.491
BAT+ on Top Layer "BAT+_L01_P000" (solid, remove dead copper, pour order 0): 42.799,120.873 cw(c44.1,120.873) 43.18,121.793 cw(c43.487,121.486) 43.487,121.92 55.14,121.92 cw(c55.14,121.053) 55.753,121.666 cw(c55.446,121.359) 55.88,121.359 55.88,116.639 cw(c55.446,116.639) 55.753,116.332 cw(c55.446,116.639) 55.446,116.205 51.847,116.205 cw(c51.847,117.506) 50.927,116.586 ccw(c50.62,116.279) 50.62,116.713 48.44,116.713 ccw(c48.44,116.279) 48.133,116.586 ccw(c48.612,116.107) 47.934,116.107 47.934,115.047 cw(c46.878,115.047) 47.625,114.3 cw(c46.705,115.22) 46.705,113.919 44.152,113.919 cw(c44.152,115.653) 42.926,114.427 cw(c43.233,114.734) 42.799,114.734
GND on Bottom Layer "PACK+_L01_P-001" (solid, remove dead copper, pour order 9): 69.723,97.917 cw(c70.03,97.917) 69.813,98.134 69.977,98.298 94.054,98.298 ccw(c94.054,98.732) 94.361,98.425 ccw(c94.054,98.732) 94.488,98.732 94.488,101.898 ccw(c92.754,101.898) 93.98,103.124 93.962,103.142 cw(c95.758,104.938) 93.218,104.938 93.218,112.618 ccw(c91.917,112.618) 92.837,113.538 ccw(c92.224,112.925) 92.224,113.792 88.936,113.792 cw(c88.936,116.332) 87.14,114.536 86.342,115.334 cw(c88.138,117.13) 85.598,117.13 85.598,120.059 cw(c87.332,120.059) 86.106,121.285 cw(c87.639,119.752) 87.639,121.92 114.772,121.92 cw(c114.772,119.38) 116.568,121.176 117.112,120.632 cw(c115.316,118.836) 117.856,118.836 117.856,99.096 cw(c115.316,99.096) 117.112,97.3 115.044,95.232 cw(c113.248,97.028) 113.248,94.488 70.336,94.488 cw(c70.336,95.355) 69.723,94.742
BAT- on Bottom Layer "PACK+_L01_P-001" (solid, remove dead copper, pour order 8): 42.799,120.694 cw(c44.533,120.694) 43.307,121.92 83.61,121.92 cw(c83.61,120.186) 84.836,121.412 cw(c83.303,119.879) 85.471,119.879 85.471,117.003 ccw(c88.011,117.003) 86.215,115.207 87.013,114.409 ccw(c88.809,116.205) 88.809,113.665 91.611,113.665 cw(c91.611,111.931) 92.837,113.157 cw(c92.224,112.544) 93.091,112.544 93.091,104.604 ccw(c94.825,104.604) 93.599,103.378 93.617,103.36 cw(c91.821,101.564) 94.361,101.564 94.361,99.165 cw(c93.494,99.165) 94.107,98.552 cw(c93.8,98.859) 93.8,98.425 69.32,98.425 ccw(c69.32,97.558) 68.707,98.171 ccw(c69.014,97.864) 68.58,97.864 68.58,94.996 cw(c68.273,94.996) 68.49,94.779 68.326,94.615 cw(c68.019,94.922) 68.019,94.488 44.332,94.488 cw(c44.332,96.656) 42.799,95.123
PACK+ on Top Solder "PACK+_L01_P-001" (solid): 100.711,120.269 100.711,115.443 86.106,115.443 86.106,120.269 86.106,115.443 86.106,120.269
BAT- on Top Solder "PACK+_L01_P-001" (solid): 48.514,98.044 55.118,98.044 55.118,95.25 48.514,95.25
GND on Top Solder "PACK+_L01_P-001" (solid): 76.327,97.155 93.472,97.155 93.472,95.377 76.327,95.377

## Keep-outs
Keep-Out Layer:
  the board outline again, w1

## Silkscreen, mask and mechanical layers (free items; w line width, h text height)
Top Overlay:
  text "Gas Gauge电池电量计" at 94.237,121.109 h3
  text "SMBC" at 118.237,111.276 h2.03
  text "SMBD" at 118.237,108.782 h2.03
  text "PRES" at 118.237,106.196 h2.03
  text "RTP-INT" at 118.237,103.632 h2.03
  text "GND" at 118.237,100.908 h2.03
Mechanical 1:
  lines w1: 31.115,30.099 ccw(c32.385,30.099) 32.385,28.829 130.175,28.829 ccw(c130.175,30.099) 131.445,30.099 131.445,123.317 ccw(c130.175,123.317) 130.175,124.587 32.385,124.587 ccw(c32.385,123.317) 31.115,123.317 31.115,105.156 31.115,30.099